# EAGLE board draft1 (EAGLE 7.6.0)
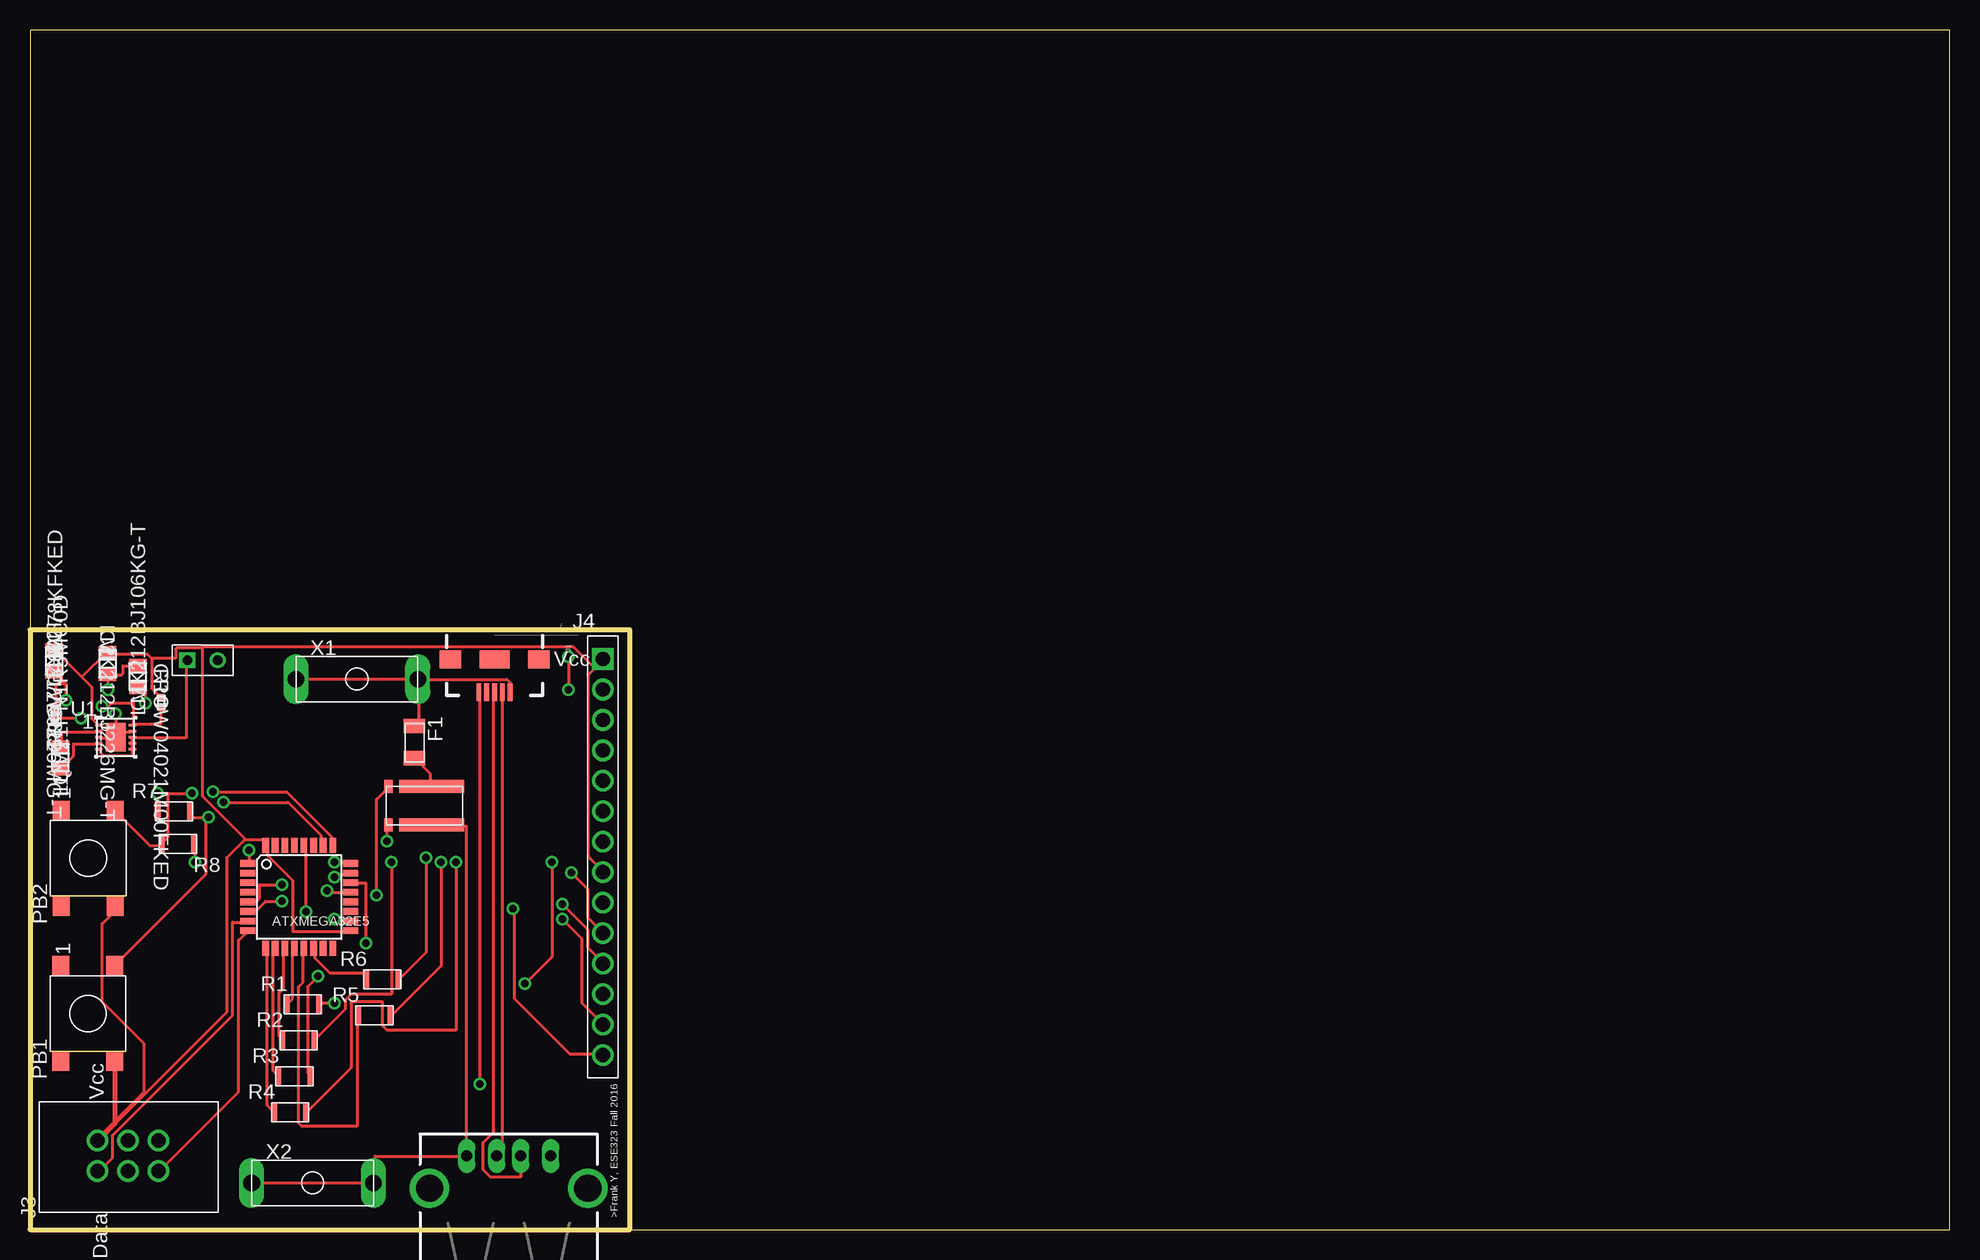
[diagram p0: board, top side]
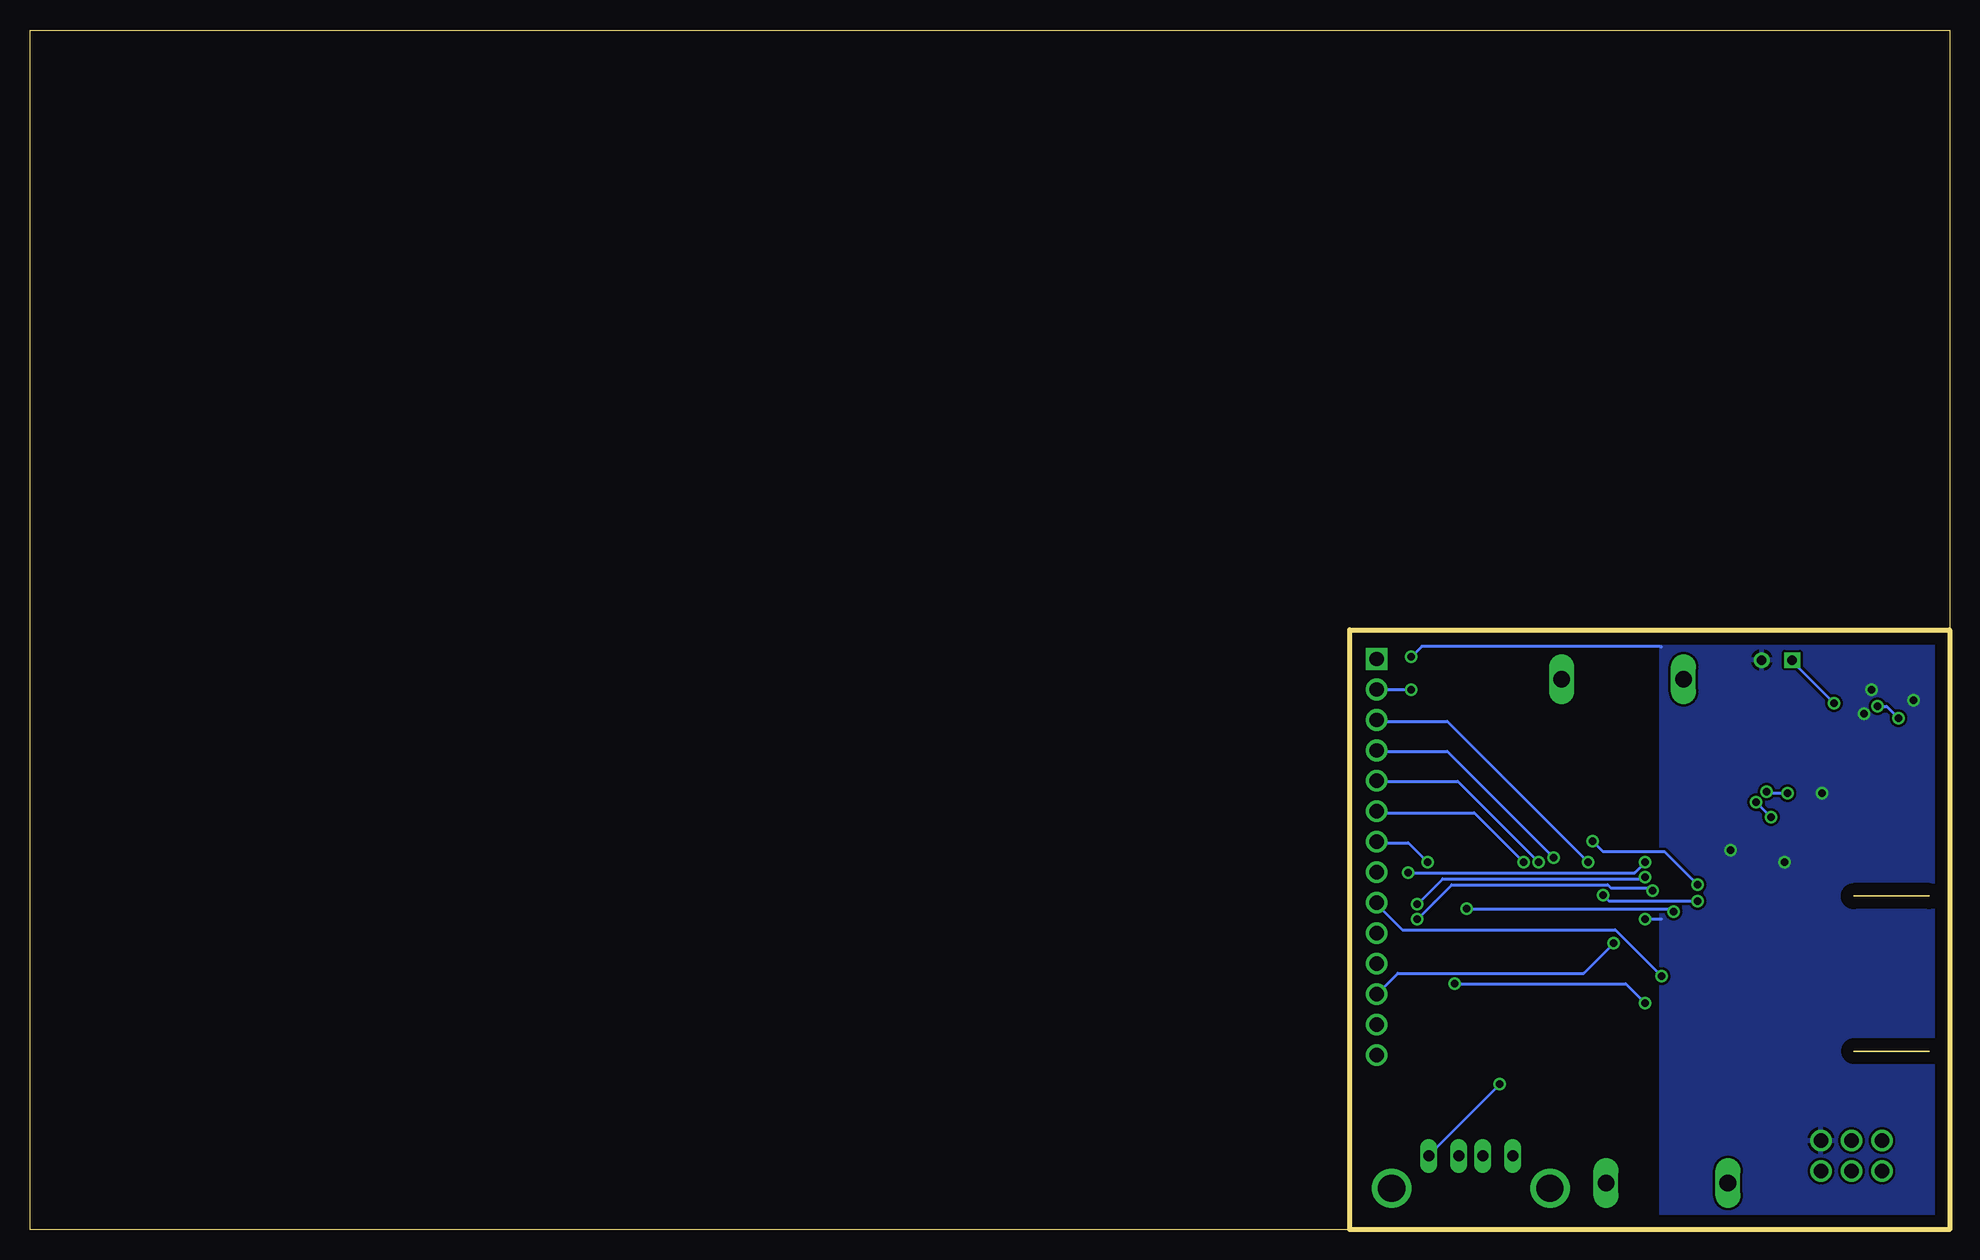
[diagram p1: board, bottom side, seen from below]

Size 160 x 100 mm. Coordinates in mm from the lower left corner, seen from the top.
Outline: 50,0 160,0 160,100 0,100 0,50
Outline: 50,0 50,50 0,50
Outline: 0,50 0,0 50,0
Copper layers (1*16): Top 0.035mm / dielectric 1.5mm / Bottom 0.035mm
Design rules "default": minimum track width 10mil, minimum drill 24mil, track to track 8mil, track to pad 8mil, pad to pad 8mil, via to via 8mil, smd to smd 8mil, copper to edge 40mil, drill to drill 8mil, minimum pad ring 10mil, minimum via ring 8mil, stop-mask expansion 4mil, vias tented up to drill 0mil, thermal gap 10mil

## Footprints (pad centres in the part's own frame; a part is rotated, then mirrored left to right if it is on the bottom)
TQFP32-08 = smd 1.27 x 0.559: 1 -4.293,2.8; 2 -4.293,2; 3 -4.293,1.2; 4 -4.293,0.4; 5 -4.293,-0.4; 6 -4.293,-1.2; 7 -4.293,-2; 8 -4.293,-2.8; 17 4.293,-2.8; 18 4.293,-2; 19 4.293,-1.2; 20 4.293,-0.4; 21 4.293,0.4; 22 4.293,1.2; 23 4.293,2; 24 4.293,2.8 | smd 0.559 x 1.27: 9 -2.8,-4.293; 10 -2,-4.293; 11 -1.2,-4.293; 12 -0.4,-4.293; 13 0.4,-4.293; 14 1.2,-4.293; 15 2,-4.293; 16 2.8,-4.293; 25 2.8,4.293; 26 2,4.293; 27 1.2,4.293; 28 0.4,4.293; 29 -0.4,4.293; 30 -1.2,4.293; 31 -2,4.293; 32 -2.8,4.293
0805 = smd 1.118 x 1.448: 1 -0.902,0; 2 0.902,0
BELFUSE-C1Q5 = smd 1.2 x 1.8: P$1 0.2,-0.8; P$2 2.9,-0.8
USB-B-MICRO-SMD_V03 = smd 1.45 x 0.4: D+ 2.725,0; D- 2.725,0.65; GND 2.725,-1.3; ID 2.725,-0.65; VBUS 2.725,1.3 | smd 1.5 x 1.8: SHIELD1 0,3.685; SHIELD2 0,-3.685 | smd 1.5 x 2.5: SHIELD3 0,0
87520 = drill 0.914 long: 1 -3.5,2.71; 2 -1,2.71; 3 1,2.71; 4 3.5,2.71 | drill 2.261: S1 -6.6,0; S2 6.6,0
JTAG6 = drill 1.2: CLK -1.27,-6.14; DATA -1.27,-1.06; GND 1.27,-6.14; NC1 -1.27,-3.6; NC2 1.27,-3.6; VCC 1.27,-1.06
TFTLCD = drill 1.2: CS 0,7.62; D/C 0,2.54; GND 0,10.16; LED 0,-5.08; MISO 0,-7.62; MOSI 0,0; RST 0,5.08; SCK 0,-2.54; T_CLK 0,-10.16; T_CS 0,-12.7; T_DIN 0,-15.24; T_DO 0,-17.78; T_IRQ 0,-20.32 | drill 1.2 square: VCC 0,12.7
PB-B3FS-1010P = smd 1.6 x 1.4: P$1 4,2.25; P$2 4,-2.25; P$3 -4,-2.25; P$4 -4,2.25
RC1206 = smd 0.5 x 1.6: P$1 -1.4,0; P$2 1.3,0
0402 = smd 0.559 x 0.61: 1 -0.419,0; 2 0.419,0
RESISTOR_4PIN = smd 1.1 x 5.4: I_IN 1.6,-0.2; I_OUT -1.6,-0.2 | smd 1.1 x 0.7: V+ 1.6,3.4; V- -1.6,3.4
DRC0010J = smd 0.6 x 0.24: 1 -1.4,1; 2 -1.4,0.5; 3 -1.4,0; 4 -1.4,-0.5; 5 -1.4,-1; 6 1.4,-1; 7 1.4,-0.5; 8 1.4,0; 9 1.4,0.5; 10 1.4,1 | smd 1.65 x 2.4: 11 0,0
BATTERYHOLDER = drill 0.8: BATGND 0,-1.27 | drill 0.8 square: BATVCC 0,1.27
CINCH-BANANA = drill 1.4 long: P$1 -5.08,0; P$2 5.08,0

## Placement (x,y rotation side)
ATXMEGA32E5  U2  [TQFP32-08]  22.44,27.72 0 top
C1  LMK212BJ106KG-T  [0805]  8.99,46.09 90 top
C2  LMK212BJ226MG-T  [0805]  6.47,47.18 270 top
C3  LMK212BJ226MG-T  [0805]  2.01,47.4 270 top
F1  BELFUSE-C1Q5  [BELFUSE-C1Q5]  32.85,42.18 270 top
I1  LQM21PN1R5MC0D  [0805]  2.53,39.33 90 top
J1  USB-MICROB"  [USB-B-MICRO-SMD_V03]  38.72,47.51 270 top
J2  87520  [87520]  39.9,3.43 0 top
J3  JTAG-6  [JTAG6]  4.57,6.14 90 top
J4  TFTLCDTFTLCD-DEV  [TFTLCD]  47.76,34.86 0 top
PB1  PB-B3FS-1010P  [PB-B3FS-1010P]  4.82,18.01 90 top
PB2  PB-B3FS-1010P  [PB-B3FS-1010P]  4.85,30.95 90 top
R1  1k  [RC1206]  22.79,18.77 0 top
R2  1k  [RC1206]  22.44,15.77 0 top
R3  1k  [RC1206]  22.09,12.77 0 top
R4  1k  [RC1206]  21.74,9.77 0 top
R5  1k  [RC1206]  28.76,17.85 0 top
R6  1k  [RC1206]  29.41,20.85 0 top
R7  1k  [RC1206]  12.06,34.85 0 top
R8  1k  [RC1206]  12.29,32.15 180 top
R9  CRCW0402178KFKED  [0402]  2.07,43.01 90 top
R10  CRCW04021M00FKED  [0402]  10.93,43.94 270 top
R11  RESISTOR_4PIN  [RESISTOR_4PIN]  33.28,35.33 90 top
U1  TPS63000DRCR  [DRC0010J]  7.14,41.04 0 top
U$12  BATTERYHOLDER  [BATTERYHOLDER]  14.38,47.47 90 top
X1  CINCH-BANANA  [CINCH-BANANA]  27.25,45.88 0 top
X2  CINCH-BANANA  [CINCH-BANANA]  23.55,3.88 0 top

## Library data of the parts
ATXMEGA32E5 = ese323
C1-C3 = 00ese323; MANUFACTURER_NAME: Taiyo Yuden; VENDOR: Taiyo Yuden
F1 J2-J4 PB1 PB2 R1-R8 R11 U$12 X1 X2 = 00ese323
I1 = 00ese323; MANUFACTURER_NAME: MuRata; VENDOR: MuRata
J1 = 00ese323; PROD_ID: CONN-11752
R9 R10 = 00ese323; MANUFACTURER_NAME: Vishay-Dale; VENDOR: Vishay-Dale
U1 = 00ese323; MANUFACTURER_NAME: Texas Instruments; MANUFACTURER_PART_NUMBER: TPS63000DRCR

## Nets
3.3V: ATXMEGA32E5.17 ATXMEGA32E5.32 C2.1 C3.1 J3.VCC J4.LED J4.VCC PB1.P$3 PB2.P$3 R10.1 U1.1
3V: C1.1 U1.5 U1.6 U1.7 U1.8 U$12.BATVCC
GND: ATXMEGA32E5.1 ATXMEGA32E5.18 C1.2 C2.2 C3.2 J3.GND J4.GND R7.P$1 R8.P$1 R9.2 U1.3 U1.9 U1.11 U$12.BATGND
N$1: ATXMEGA32E5.7 J3.DATA
N$2: ATXMEGA32E5.8 J3.CLK
N$3: ATXMEGA32E5.9 R4.P$1
N$4: ATXMEGA32E5.10 R3.P$1
N$5: ATXMEGA32E5.11 R2.P$1
N$6: ATXMEGA32E5.12 R1.P$1
N$7: J4.MOSI R4.P$2
N$8: J4.MISO R3.P$2
N$9: J4.SCK R1.P$2
N$10: J4.CS R2.P$2
N$11: ATXMEGA32E5.14 R6.P$1
N$12: J4.RST R6.P$2
N$13: ATXMEGA32E5.13 R5.P$1
N$14: J4.D/C R5.P$2
N$15: ATXMEGA32E5.28 J4.T_IRQ
N$16: ATXMEGA32E5.21 J4.T_DO
N$17: ATXMEGA32E5.22 J4.T_DIN
N$18: ATXMEGA32E5.23 J4.T_CS
N$19: ATXMEGA32E5.24 J4.T_CLK
N$20: ATXMEGA32E5.26 PB1.P$2 R7.P$2
N$21: ATXMEGA32E5.25 PB2.P$2 R8.P$2
N$22: ATXMEGA32E5.6 R11.V+
N$23: ATXMEGA32E5.5 R11.V-
N$24: F1.P$1 J1.VBUS X1.P$1 X1.P$2
N$25: F1.P$2 R11.I_IN
N$26: J1.GND J2.4
N$28: J1.D+ J2.3
N$29: J1.D- J2.2
N$30: J2.1 R11.I_OUT X2.P$1 X2.P$2
N$31: I1.1 U1.4
N$32: I1.2 U1.2
N$34: R9.1 R10.2 U1.10

## Tracks (layer width: path | path; a pad name or v marks a point on that pad's centre or on a via)
3.3V
  Top 0.254: J4.LED 47.75,29.88 46.5,31.12 46.5,46.25 47.75,47.5 J4.VCC 47,46.88 45.25,48.62 14.38,48.62 14.38,48.5 | 4.31,46.06 3.12,47.25 C3.1 | 4.31,46.06 5.12,45.25 5.12,42.62 5.62,42.12 U1.1 | 10.12,47.62 10.12,45.12 10.88,44.38 R10.1 | 10.12,47.62 9.75,48 6.5,48 C2.1 6.38,48.12 4.31,46.06 | ATXMEGA32E5.17 26.62,24.88 21.88,24.88 21.88,29.12 19.75,31.25 19.75,32 ATXMEGA32E5.32 19.62,32.12 19.62,32.5 17.88,32.5 | 17.88,32.5 16.38,31 16.38,18.12 5.75,7.5 J3.VCC 6,7.5 6,8 9.5,11.5 9.5,15.5 6,19 6,25.5 7,26.5 PB2.P$3 | 10.12,47.62 12.12,47.62 12.12,48.38 12.25,48.5 14.38,48.5 | 14.38,48.5 14.38,36.12 17.88,32.62 17.88,32.5
  Top 0.406: PB1.P$3 7.07,8.85 J3.VCC
3V  (via drill 0.61)
  Top 0.254: U1.5 5.75,40 5.88,39.88 5.88,39.75 6.12,39.5 8.5,39.5 8.5,40 U1.6 8.5,40.12 8.5,40.5 U1.7 8.5,40.62 8.5,41 U1.8 8.62,41 13,41 13,47.38 U$12.BATVCC | v9.62,43.88 9.62,44.5 9,45.12 C1.1
  Bottom 0.254: v9.62,43.88 13.12,47.38 U$12.BATVCC
GND  (via drill 0.61)
  Top 0.254: U1.11 7.12,41 5.75,41 U1.3 | U1.9 8.5,41.5 7.12,41.5 7.12,41.12 U1.11 | R9.2 2.12,43.5 2.12,45.38 2.25,45.5 3,45.5 C3.2 3,45.38 v3,44.12 | v18.25,31.62 18.25,30.62 ATXMEGA32E5.1 | v25.38,25.88 25.38,25.75 26.62,25.75 ATXMEGA32E5.18 | v6.5,45 6.5,46.25 C2.2 6.62,46.25 7.62,46.25 7.75,46.38 7.75,47 8.88,47 C1.2 | v13.75,30.62 13.75,32.12 R8.P$1 | v10.62,36.38 10.62,34.88 R7.P$1 | v7.12,43 7.12,41.62 U1.11 | v44.88,47.75 v44.88,45
  Bottom 0.254: 24,25.88 v25.38,25.88 | v44.88,45 47.75,45 J4.GND | v44.88,47.75 44,48.62 24.12,48.62 24,48.58
  pour Bottom: 1,49 1,1 24,1 24,49
N$1
  Top 0.254: ATXMEGA32E5.7 18.12,25.62 16.88,25.62 16.88,17.88 6.88,7.88 6.88,6 5.75,4.88 J3.DATA
N$2
  Top 0.254: ATXMEGA32E5.8 18.12,24.88 17.38,24.12 17.38,11.5 10.75,4.88 J3.CLK
N$3
  Top 0.254: ATXMEGA32E5.9 19.75,23.38 19.75,10.38 20.25,9.88 R4.P$1
N$4
  Top 0.254: ATXMEGA32E5.10 20.38,23.38 20.25,23.25 20.25,13.25 20.62,12.88 R3.P$1
N$5
  Top 0.254: ATXMEGA32E5.11 21.12,23.38 21.12,20.12 20.75,19.75 20.75,16.12 21,15.88 R2.P$1
N$6
  Top 0.254: ATXMEGA32E5.12 22,23.38 21.88,23.25 21.88,19.25 21.5,18.88 R1.P$1
N$7  (via drill 0.61)
  Top 0.254: v35.5,30.62 35.5,16.62 29.75,16.62 29.38,17 29.38,19 26.88,19 26.75,18.88 26.75,13.5 23.12,9.88 R4.P$2
  Bottom 0.254: v35.5,30.62 39.62,34.75 47.75,34.75 J4.MOSI
N$8  (via drill 0.61)
  Top 0.254: v24,21.12 23.12,20.25 23.12,13.12 23.38,12.88 R3.P$2
  Bottom 0.254: v24,21.12 27.88,25 45.62,25 47.75,27.12 J4.MISO
N$9  (via drill 0.61)
  Top 0.254: v25.38,18.88 24.12,18.88 R1.P$2 | v41.25,20.5 43.5,22.75 v43.5,30.62
  Bottom 0.254: v25.38,18.88 27,20.5 v41.25,20.5 | v43.5,30.62 45.12,32.25 47.75,32.25 J4.SCK
N$10  (via drill 0.61)
  Top 0.254: v30.12,30.62 30.12,19.62 26.75,19.62 26.25,19.12 26.25,18.38 23.75,15.88 R2.P$2
  Bottom 0.254: v30.12,30.62 41.88,42.38 47.75,42.38 J4.CS
N$11
  Top 0.254: ATXMEGA32E5.14 23.75,23.38 23.75,22.62 25,21.38 28,21.38 28,20.88 R6.P$1
N$12  (via drill 0.61)
  Top 0.254: v33,31 33,23.12 30.75,20.88 R6.P$2
  Bottom 0.254: v33,31 41.88,39.88 47.75,39.88 J4.RST
N$13
  Top 0.254: ATXMEGA32E5.13 22.75,23.38 22.75,20.62 22.38,20.25 22.38,8.88 22.62,8.62 27.25,8.62 27.25,17.75 R5.P$1
N$14  (via drill 0.61)
  Top 0.254: v34.25,30.62 34.25,22 30.12,17.88 R5.P$2
  Bottom 0.254: v34.25,30.62 41,37.38 47.75,37.38 J4.D/C
N$15  (via drill 0.61)
  Top 0.254: v23,26.5 23,31.88 22.88,32 ATXMEGA32E5.28 | v40.25,26.75 40.38,26.62 40.38,19.25 45,14.62 47.75,14.62 J4.T_IRQ
  Bottom 0.254: v23,26.5 23.25,26.75 v40.25,26.75
N$16  (via drill 0.61)
  Top 0.254: v24.75,28.25 24.75,28.12 26.62,28.12 ATXMEGA32E5.21 | v44.38,25.88 46,24.25 46,18.88 47.75,17.12 J4.T_DO
  Bottom 0.254: v24.75,28.25 25,28.5 28.25,28.5 28.5,28.75 41.5,28.75 v44.38,25.88
N$17  (via drill 0.61)
  Top 0.254: v28,23.88 28,28.88 26.75,28.88 ATXMEGA32E5.22
  Bottom 0.254: v28,23.88 30.5,21.38 46,21.38 J4.T_DIN
N$18  (via drill 0.61)
  Top 0.254: v25.38,29.38 25.38,29.62 26.62,29.62 ATXMEGA32E5.23 | v44.38,27.12 46.5,25 46.5,23.5 47.75,22.25 J4.T_CS
  Bottom 0.254: v25.38,29.38 25.5,29.25 42.25,29.25 v44.38,27.12
N$19  (via drill 0.61)
  Top 0.254: v25.38,30.62 26.62,30.62 ATXMEGA32E5.24 | v45.12,29.75 46.5,28.38 46.5,26 47.75,24.75 J4.T_CLK
  Bottom 0.254: v25.38,30.62 26.25,29.75 v45.12,29.75
N$20  (via drill 0.61)
  Top 0.254: v16.12,35.62 21.5,35.62 24.25,32.88 24.25,32.25 24.38,32.12 ATXMEGA32E5.26 | R7.P$2 13.38,34.75 13.38,34.38 v14.88,34.38 14.62,34.25 14.62,29.62 7.12,22.12 PB1.P$2
  Bottom 0.254: v14.88,34.38 v16.12,35.62
N$21  (via drill 0.61)
  Top 0.254: v15.25,36.5 21.38,36.5 25.12,32.75 25.12,32.12 ATXMEGA32E5.25 | v13.5,36.38 11.5,36.38 11.5,32.75 11,32.25 R8.P$2 10.88,32.12 10.88,32 10,32 7.12,34.88 PB2.P$2
  Bottom 0.254: v15.25,36.5 15.12,36.38 v13.5,36.38
N$22  (via drill 0.61)
  Top 0.254: v28.88,27.88 28.88,35.88 29.88,36.88 R11.V+ | v21,27.38 19.62,27.38 18.88,26.62 18.25,26.62 ATXMEGA32E5.6
  Bottom 0.254: v28.88,27.88 28.38,27.38 v21,27.38
N$23  (via drill 0.61)
  Top 0.254: v29.75,32.38 29.75,33.5 29.88,33.62 R11.V- | v21,28.75 19.12,28.75 19.12,27.62 18.88,27.38 18.25,27.38 ATXMEGA32E5.5
  Bottom 0.254: v29.75,32.38 28.88,31.5 23.75,31.5 v21,28.75
N$24
  Top 0.254: J1.VBUS 40,44.88 40,45.62 39.75,45.88 32.38,45.88 X1.P$2 | F1.P$1 32.12,42 32.38,42.25 32.38,45.75 X1.P$2 | X1.P$1 22.25,45.88 32.25,45.88 X1.P$2
N$25
  Top 0.254: F1.P$2 32.12,39.25 33.38,38 33.38,37 R11.I_IN
N$26  (via drill 0.61)
  Top 0.254: v37.5,12.12 37.5,44.75 J1.GND
  Bottom 0.254: v37.5,12.12 43.38,6.25 J2.4
N$28
  Top 0.254: J1.D+ 38.62,44.75 38.62,8.12 37.75,7.25 37.75,5 38.38,4.38 40.88,4.38 40.88,6.12 J2.3
N$29
  Top 0.254: J1.D- 39.38,44.75 39.38,6.62 39,6.25 J2.2
N$30
  Top 0.254: X2.P$1 18.5,3.88 X2.P$2 28.75,4 28.75,6.12 36.38,6.12 J2.1 36.38,6.25 36.38,33.62 33.5,33.62 R11.I_OUT
N$31
  Top 0.254: U1.4 5.62,40.5 3.62,40.5 3.62,39.5 2.62,38.5 I1.1
N$32
  Top 0.254: U1.2 5.62,41.5 2.62,41.5 2.62,40.25 I1.2
N$34  (via drill 0.61)
  Top 0.254: 8.62,42.12 10.88,42.12 10.88,43.5 R10.2 | 8.62,42.12 U1.10 | v4.25,42.62 2.12,42.62 R9.1 | v6,43.62 6.5,43.62 6.75,43.88 8.62,43.88 8.62,42.12
  Bottom 0.254: v4.25,42.62 5.25,43.62 v6,43.62

## Text on the board
tSilk: >Frank Y, ESE323 Fall 2016